# Altium PCB SensWear-V1R1-MainBoard.PcbDoc (part 3 of 3)
Units mm, origin at the board's own origin, x right, y up, seen from the top; angles counter-clockwise.
Board outline 50.5 x 8.5 mm, 4 copper layers (Top Layer, Layer 1, Layer 2, Bottom Layer), stack 0.148 mm thick; 73 components, 59 nets, 271 pads, 109 vias.
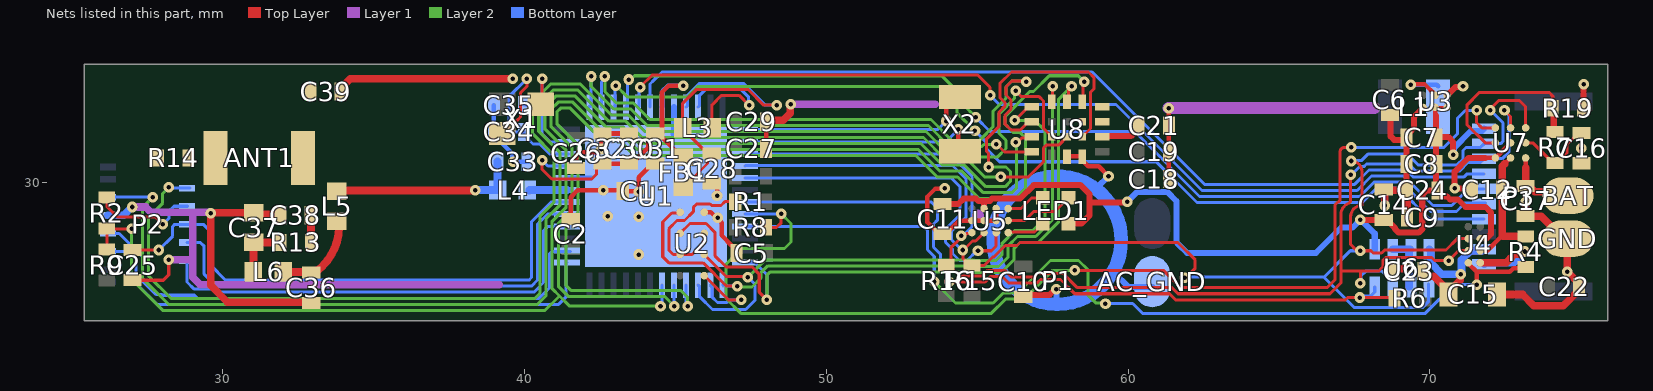
[diagram p4: the nets of this part, all layers, seen from the top]

## Via types
v1: diameter 0.35, hole 0.15, Top Layer to Bottom Layer, tented both sides, 109 vias

## Nets (pads, with @x,y where several pads share a name; then routed paths per layer and width w, separated by ;. In a path a pad name is that pad's centre, name@x,y a point inside that pad or via, vN(x,y) a via of type N, cw(c..) or ccw(c..) an arc to the next point about the centre after c; other vN are vias at no path point) (continued)
GAUGE_IRQ: R8.2 U1.8 U7.A1 | length 38.8
  Top Layer w0.1: R8.2@48,28.5 48.35,28.5 48.5,28.65 v1(48.5,28.95) ; v1(58.225,27.075) 61.165,27.075 61.74,26.5 66.591,26.5 66.85,26.759 66.85,27.156 66.85,29.175 cw(c67.025,29.175) 66.962,29.338 ccw(c66.925,29.431) 67.015,29.388 67.025,29.409 67.025,31 cw(c67.175,31) 67.175,31.15 v1(67.4,31.15) ; v1@71.55,32.35 71.55,31.975 71.725,31.8 U7.A1@72.175,31.8
  Layer 2 w0.1: v1(48.5,28.95) 48.825,28.625 48.825,28.015 48.61,27.8 47.2,27.8 46.675,27.275 46.675,26.14 47.165,25.65 55.465,25.65 55.94,26.125 56.557,26.125 57.507,27.075 v1(58.225,27.075)
  Bottom Layer w0.1: U1.8@47.302,28.936 48.486,28.936 v1(48.5,28.95) ; v1(67.4,31.15) 70.462,31.15 70.925,31.613 70.925,32.125 71.175,32.375 v1(71.55,32.375)
GND: AC_GND.1 C1.2 C2.2 C5.1 C6.2 C7.1 C8.2 C9.2 C10.1 C11.2 C12.2 C14.1 C15.1 C16.2 C17.2 C18.1 C19.1 C21.2 C22.1 C23.1 C24.2 C25.1 C26.2 C27.2 C28.1 C29.2 C30.1 C31.1 C32.1 C33.2 C34.1 C35.1 C36.1 C37.1 C38.1 C39.2 GND.1 P1.2 P2.7 P3.10 R19.2 U1.32 U1.44 U1.49 U2.D1 U3.A1 U3.C2 U4.D2 U5.A3 U5.B1 U5.B2 U5.B3 U6.2 U6.3 U6.6 U7.B2 U7.C1 U8.6 U8.7 | length 97.3
  Top Layer w0.1: C16.2@75.025,30.625 v1@75.025,31.075
  Top Layer w0.12: C25.1@27,26.75 28.025,26.75 28.2,26.925 v1(28.2,27.425) v1@28.2,27.45
  Top Layer w0.15: C2.2@41.527,28.776 41.527,29.501 41.752,29.726 v1(42.602,29.726) 43.227,29.726 C1.2@43.252,29.701 v1@43.727,29.701 ; C26.2@41.702,30.461 41.702,30.898 41.789,30.986 42.38,30.986 42.49,31.097 v1(42.544,31.097) 42.544,31.493 C32.1@42.452,31.586 ; C32.1@42.562,31.611 C30.1@43.452,31.611 ; v1@43.777,29.701 43.777,30.161 44.227,30.611 C31.1@44.327,30.611 ; U2.D1@45.952,29.001 46.174,29.001 46.527,28.648 46.527,28.231 46.883,27.875 46.9,27.875 46.95,27.825 C5.1@46.95,27.65 ; C28.1@46.202,29.951 46.25,29.951 46.375,29.826 v1(46.375,29.55) ; C27.2@48.002,31.101 C29.2@48.002,32.001 C29.2@48.05,32.05 ; v1(53.925,29.8) 53.912,29.787 53.615,29.787 53.35,29.522 53.35,28.675 53.75,28.275 C11.2@53.85,28.275 53.95,28.275 54.4,28.725 U5.B1@54.825,28.725 U5.B2@55.225,28.725 U5.B3@55.6,28.725 ; U5.B3@55.625,28.725 U5.A3@55.625,29.125 ; U8.6@57.975,30.862 58.475,30.862 58.475,30.724 58.674,30.525 59.025,30.525 v1(59.35,30.2) ; C18.1@61.35,30.1 C19.1@61.35,31 C21.2@61.35,31.875 v1(61.35,32.45) ; 71.85,30.8 U7.C1@72.175,30.8 ; U7.C1@72.2,30.825 U7.B2@72.675,31.3
  Top Layer w0.2: C10.1@56.525,26.1 56.686,26.261 57.395,26.261 57.584,26.45 v1(57.625,26.45) ; C6.2@68.7,32.075 68.7,31.517 68.817,31.4 C7.1@69.225,31.4 ; C24.2@69.225,29.75 C8.2@69.225,30.6 C7.1@69.225,31.4 ; U3.A1@69.775,32.475 69.775,32.461 69.475,32.161 69.475,31.792 69.358,31.675 69.325,31.675 69.225,31.575 C7.1@69.225,31.475 C7.1@69.225,31.4 ; U3.C2@70.575,32.875 70.846,33.146 71.071,33.146 v1(71.1,33.175) ; v1(70.825,29.8) 70.825,30.35 71.275,30.8 71.85,30.8 ; v1@70.832,29.793 71.3,29.793 C12.2@71.332,29.793 ; R19.2@75.085,32.45 75.092,32.457 75.092,33.242 v1(75.1,33.25)
  Top Layer w0.25: C38.1@31.9,28.9 31.86,28.94 31.035,28.94 30.997,28.978 29.603,28.978 v1(29.6,28.975) 29.6,26.575 30.15,26.025 32.9,26.025 C36.1@32.925,26 ; C39.2@33.9,33 33.9,33.1 34.226,33.426 v1(39.602,33.426) ; C29.2@48.052,32.052 48.577,32.052 48.8,32.275 48.8,32.523 48.806,32.529 48.806,32.594 v1@48.8,32.6 ; C14.1@68.475,29.75 68.475,29.7 68.5,29.675 v1(68.5,29.225) ; C14.1@68.587,29.737 C24.2@69.25,29.737 ; C23.1@68.725,27.15 68.744,27.131 69.281,27.131 v1(69.3,27.15) ; C23.1@68.823,26.927 C23.1@68.875,26.875 ; C9.2@69.25,28.825 C24.2@69.25,29.725 ; U4.D2@71.675,27.325 72.529,27.325 72.675,27.471 72.675,27.473 72.807,27.605 73.028,27.605 73.123,27.7 v1(73.15,27.7) ; C15.1@72.225,26.275 73.075,26.275 73.45,25.9 74.425,25.9 74.95,26.425 C22.1@74.95,26.525 ; C17.2@73.175,28.875 v1@73.175,29.325 ; C17.2@73.25,28.875 73.7,28.875 74.45,28.125 GND.1@74.525,28.125 ; GND.1@74.55,28.1 v1(74.55,27.025) C22.1@75,26.575
  Layer 1 w0.25: v1(27,29.175) 27.434,29.175 27.609,29 28.975,29 ; v1(28.2,27.425) 29,27.425 ; v1(29.6,28.975) 29.581,28.994 29.51,28.994 29.504,29 28.975,29 ; 39.153,26.6 29.25,26.6 29,26.85 29,27.425 ; v1(48.825,32.575) 53.6,32.575 ; 28.975,29 29,28.975 29,27.425
  Layer 1 w0.4: v1@61.348,32.45 v1(61.35,32.45) 68.173,32.45
  Bottom Layer w0.15: C34.1@38.977,31.661 38.977,31.561 39.588,30.949 39.588,30.714 v1(39.627,30.676) C33.2@40.102,30.676 ; C34.1@38.977,31.726 C35.1@38.977,32.551 ; U1.32@41.402,30.136 42.217,30.136 U1.49@42.227,30.126
  Bottom Layer w0.2: U1.49@44.927,31.601 44.952,31.626 U1.44@44.952,32.486 ; 57.6,25.9 57.625,25.925 57.625,25.95 v1(57.625,26.45) ; v1(59.35,30.2) 58.967,29.817 58.967,29.743 58.967,29.651 59.4,29.218 ; 59.55,26.975 60,26.525 AC_GND.1@60.8,26.525
  Bottom Layer w0.25: P2.7@26.19,28.9 26.709,28.9 26.984,29.175 v1(27,29.175) ; U6.2@68.775,27.77 69.345,27.77 U6.3@69.35,27.775 ; v1@69.3,27.177 v1(69.3,27.15) 69.319,27.131 v1@69.319,27.102 ; U6.6@69.325,26.525 v1@69.325,27.047 ; v1@69.325,27.252 U6.3@69.325,27.75 ; P3.10@71.8,27.275 71.85,27.325 72.775,27.325 v1(73.15,27.7)
  other v1: 43.775,27.6 46.4,28.825 43.775,28.85 42.75,28.875 73.175,29.35 43.777,29.676 75.025,31.125
LED_EN: U1.5 U5.C3 | length 11.9
  Top Layer w0.1: v1(55.025,27.725) 55.475,27.725 55.625,27.875 U5.C3@55.625,28.325
  Bottom Layer w0.1: U1.5@47.302,30.136 54.139,30.136 54.425,29.85 54.425,28.917 53.95,28.442 53.95,28.174 53.95,28.008 54.183,27.775 54.183,27.633 54.415,27.4 54.66,27.4 54.985,27.725 v1(55.025,27.725)
MCU_R\E\S\E\T\: C25.2 P2.6 U1.30 | length 18.5
  Top Layer w0.1: C25.2@27,27.75 v1(27.875,27.75)
  Bottom Layer w0.1: v1(27.875,27.75) 28.333,28.208 28.333,28.532 28.401,28.6 P2.6@28.81,28.6 29.35,28.6 29.575,28.375 29.575,27.258 30.083,26.75 40.14,26.75 40.225,26.835 40.225,28.687 40.875,29.336 U1.30@41.402,29.336
MCU_RX: P2.2 U1.28 | length 15.4
  Bottom Layer w0.1: P2.2@28.81,27.4 28.81,26.69 29.05,26.45 29.817,26.45 29.917,26.35 40.306,26.35 40.625,26.669 40.625,28.395 40.767,28.536 U1.28@41.402,28.536
MCU_SWD_CLK: P2.5 U1.26 | length 18
  Bottom Layer w0.1: P2.5@26.19,28.3 26.558,28.3 27.325,27.533 27.325,26.725 27.775,26.275 27.975,26.275 28,26.25 29.05,26.25 29.15,26.15 40.475,26.15 40.825,26.5 40.825,27.625 40.9,27.7 U1.26@41.526,27.7
MCU_SWD_IO: P2.3 U1.25 | length 17.6
  Bottom Layer w0.1: P2.3@26.19,27.7 26.875,27.7 27.125,27.45 27.125,26.642 27.817,25.95 41.128,25.95 41.377,26.198 41.377,27.311 U1.25@41.402,27.336
MCU_TX: P2.4 U1.29 | length 15.8
  Bottom Layer w0.1: P2.4@28.81,28 29.25,28 29.375,27.875 29.375,26.95 29.675,26.65 29.9,26.65 30,26.55 39.9,26.55 40.223,26.55 40.425,26.752 40.425,27.075 40.425,28.604 40.758,28.936 U1.29@41.392,28.936
MEM_SPI_C\S\: U1.14 U2.A1 | length 3.1
  Top Layer w0.1: U2.A1@45.952,26.901 46.753,26.1 v1(47.175,26.1)
  Bottom Layer w0.1: U1.14@46.152,26.586 46.202,26.536 46.202,26.198 46.389,26.011 46.714,26.011 46.803,26.1 v1(47.175,26.1)
MPU_CLK: U1.12 U2.C2 U8.13 | length 23.3
  Top Layer w0.1: U2.C2@45.152,28.301 45.477,28.626 46.015,28.626 46.302,28.34 46.302,27.56 46.669,27.192 47.533,27.192 47.775,26.95 47.775,26.35 v1(48.025,26.1) ; U8.13@57.975,32.687 58.027,32.739 58.027,33.152 v1@58.075,33.2
  Layer 2 w0.1: v1(48.025,26.1) 48.025,26.909 48.141,27.025 54.7,27.025 54.725,27 55.491,27 55.791,27 56.225,27.434 56.225,27.734 56.225,27.81 56.415,28 57.018,28 57.7,28.682 57.7,32.75 58.1,33.15 v1@58.125,33.15
  Bottom Layer w0.1: U1.12@47.302,27.336 47.627,27.336 48.025,26.938 v1(48.025,26.1)
  other v1: 58.125,33.175
MPU_CS#: U1.16 U8.12 | length 35.1
  Top Layer w0.1: U8.12@58.475,32.687 58.512,32.724 58.512,33.288 v1(58.55,33.325)
  Layer 2 w0.1: v1(45.402,25.888) 45.402,26.173 45.162,26.413 41.53,26.413 41.377,26.566 41.377,28.602 41.775,29 41.775,31.225 41.067,31.933 41.067,32.325 41.191,32.45 41.51,32.45 42.538,31.422 43.103,31.422 43.65,30.875 52.968,30.875 53.672,30.172 54.353,30.172 55.075,29.45 56.25,29.45 56.6,29.8 56.6,31.46 56.41,31.65 56.19,31.65 55.925,31.915 55.925,32.185 56.74,33 56.865,33 57.39,33.525 58.35,33.525 v1(58.55,33.325)
  Bottom Layer w0.1: U1.16@45.352,26.586 45.352,25.938 v1(45.402,25.888)
MPU_GPIO0: U1.38 U8.2 | length 20.8
  Top Layer w0.1: v1@56.625,33.35 56.14,33.35 55.95,33.16 55.95,32.89 56.116,32.724 56.116,32.415 55.925,32.224 55.925,31.915 56.115,31.725 56.425,31.725 56.7,32 U8.2@56.812,32
  Layer 2 w0.1: v1(42.66,33.501) 42.66,32.998 43.035,32.622 43.6,32.622 44.147,32.075 53.465,32.075 54.165,31.375 55.06,31.375 55.11,31.425 55.116,31.425 55.525,31.834 55.525,32.35 55.95,32.775 55.95,33.16 56.14,33.35 v1@56.625,33.35
  Bottom Layer w0.1: U1.38@42.55,32.488 42.55,32.86 42.552,32.861 42.552,33.325 42.66,33.433 v1(42.66,33.501)
  other v1: 56.625,33.325
MPU_GPIO1: U1.17 U8.3 | length 30.1
  Top Layer w0.1: v1(56.275,31.325) 56.343,31.325 56.485,31.467 56.641,31.467 U8.3@56.675,31.5
  Layer 2 w0.1: v1(44.952,25.888) 44.952,25.897 44.636,26.213 41.448,26.213 41.113,26.547 41.113,28.621 41.575,29.083 41.575,31.142 40.867,31.851 40.867,32.408 41.109,32.65 41.593,32.65 42.621,31.622 43.186,31.622 43.733,31.075 53.051,31.075 53.751,30.375 54.475,30.375 55.2,29.65 56.15,29.65 56.3,29.8 56.3,31.3 v1(56.275,31.325)
  Bottom Layer w0.1: v1@44.95,25.786 44.952,25.788 v1(44.952,25.888) U1.17@44.952,26.586
MPU_GPIO2: U8.10
MPU_GPIO3: U8.11
MPU_GPIO4: U8.18
MPU_IRQ#: U1.37 U8.4 | length 16.9
  Top Layer w0.1: v1(55.625,31.25) 55.655,31.25 55.905,31 U8.4@56.787,31
  Layer 2 w0.1: v1(42.203,33.501) 42.203,33.172 42.953,32.422 43.517,32.422 44.064,31.875 53.383,31.875 54.083,31.175 55.142,31.175 55.217,31.25 v1(55.625,31.25)
  Bottom Layer w0.1: U1.37@42.127,32.511 U1.37@42.152,32.486 ; U1.37@42.202,32.511 v1@42.202,33.477
MPU_MISO: U1.15 U2.B1 U8.1 | length 20.8
  Top Layer w0.1: U2.B1@45.952,27.601 46.678,26.875 47.375,26.875 v1(47.4,26.85) ; v1(56.25,32.05) 56.625,32.425 56.7,32.5 U8.1@56.812,32.5
  Layer 2 w0.1: v1(47.4,26.85) 47.975,27.425 54.865,27.425 54.89,27.4 55.625,27.4 55.825,27.6 55.825,27.975 56.25,28.4 56.852,28.4 57.25,28.798 57.25,31.7 56.9,32.05 v1@56.258,32.05
  Bottom Layer w0.1: U1.15@45.752,26.586 45.802,26.536 45.802,26.198 46.225,25.775 47.325,25.775 47.627,26.077 47.627,26.623 v1(47.4,26.85)
MPU_MOSI: U1.13 U2.D2 U8.14 | length 22
  Top Layer w0.1: U2.D2@45.152,29.026 45.102,28.976 44.877,28.976 44.577,28.676 44.577,27.526 44.777,27.326 45.915,27.326 46.692,26.55 v1(47.05,26.55) ; U8.14@57.475,32.687 57.487,32.699 57.487,33.163 v1(57.5,33.175)
  Layer 2 w0.1: v1@47.025,26.55 47.05,26.525 47.535,26.525 47.825,26.815 47.825,26.992 48.058,27.225 54.783,27.225 54.808,27.2 55.408,27.2 55.708,27.2 56.025,27.517 56.025,27.817 56.025,27.892 56.333,28.2 56.935,28.2 57.5,28.765 v1(57.5,33.175)
  Bottom Layer w0.1: U1.13@46.577,26.675 46.577,26.575 46.602,26.55 v1(47.05,26.55)
MPU_R\E\S\E\T\: R2.1 R9.2 U1.18 U8.17 | length 55.7
  Top Layer w0.1: R9.2@26.15,27.76 R2.1@26.15,28.465 26.165,28.45 v1@26.95,28.45 ; v1(55.375,30.5) 55.375,30.959 55.3,31.034 55.3,31.425 55.725,31.85 55.725,32.325 55.916,32.516 55.916,32.641 55.75,32.808 55.75,33.265 56.135,33.65 58.685,33.65 58.875,33.46 58.875,33.105 58.751,32.98 58.751,31.775 U8.17@58.475,31.5
  Layer 2 w0.1: v1(26.975,28.45) 26.975,26.775 28,25.75 40.675,25.75 41.151,26.226 ; v1(44.502,25.888) 41.49,25.888 41.151,26.226 ; v1(55.375,30.5) 55.95,30.5 56.1,30.35 56.1,30.025 55.925,29.85 55.283,29.85 54.558,30.575 53.834,30.575 53.134,31.275 43.815,31.275 43.269,31.822 42.704,31.822 41.676,32.85 41.026,32.85 40.667,32.491 40.667,31.768 41.375,31.059 41.375,29.166 40.913,28.704 40.913,26.464 41.151,26.226
  Bottom Layer w0.1: v1(44.502,25.888) 44.552,25.938 U1.18@44.552,26.586
MPU_SWD_CLK: P2.10 U8.15 | length 45.7
  Top Layer w0.1: v1(56.275,33.025) 56.468,32.832 57.054,32.832 57.2,32.687 57.2,32.425 ; 57.2,32.425 57.2,31.775 57.45,31.525 U8.15@57.475,31.525
  Layer 2 w0.1: v1(28.2,29.825) 28,29.625 28,29.3 27.525,28.825 27.525,26.9 28.275,26.15 40.342,26.15 40.502,26.31 40.502,28.858 40.975,29.331 40.975,30.894 40.267,31.602 40.267,32.656 40.86,33.25 41.842,33.25 42.87,32.222 43.434,32.222 43.981,31.675 53.3,31.675 54,30.975 54.948,30.975 55.098,30.825 55.66,30.825 55.95,31.115 55.95,31.385 55.725,31.61 55.725,32.267 56.227,32.77 56.227,32.977 v1(56.275,33.025)
  Bottom Layer w0.1: v1(28.2,29.825) 28.212,29.813 28.887,29.813 P2.10@28.9,29.8
MPU_SWD_DIO: P2.9 U8.16 | length 44.7
  Top Layer w0.1: v1(55.775,30.175) 56.7,30.175 57.2,30.675 57.2,31.136 57.288,31.225 57.7,31.225 U8.16@57.975,31.5
  Layer 2 w0.1: v1(27.675,29.5) 27.325,29.15 27.325,26.817 28.192,25.95 40.425,25.95 40.702,26.227 40.702,28.775 41.175,29.249 41.175,30.976 40.467,31.685 40.467,32.574 40.943,33.05 41.759,33.05 42.787,32.022 43.351,32.022 43.898,31.475 53.217,31.475 53.917,30.775 54.64,30.775 55.24,30.175 v1(55.775,30.175)
  Bottom Layer w0.1: P2.9@26.19,29.5 v1(27.675,29.5)
NetANT1_1: ANT1.1 C38.2 C39.1 R13.2 R14.1 | length 0.9
  Top Layer w0.265: R13.2@32.9,27.975 32.91,27.985 32.91,28.89 C38.2@32.9,28.9
NetANT1_2: ANT1.2 R14.2
NetC16_1: C16.1 R7.2 U7.B3 | length 2.7
  Top Layer w0.1: U7.B3@73.175,31.3 73.415,31.3 74.09,30.625 R7.2@74.15,30.625 ; R7.2@74.15,30.64 74.225,30.64 74.55,30.965 74.55,31.25 74.95,31.65 C16.1@75.025,31.65
NetC21_1: C21.1 U8.9 | length 1.2
  Top Layer w0.2: U8.9@59.138,31.525 60.1,31.525 60.25,31.675 C21.1@60.25,31.75
NetC28_2: C28.2 FB1.2 L3.1 U1.45 | length 10.9
  Top Layer w0.1: FB1.2@45.252,29.836 45.282,29.836 46.059,30.614 46.059,31.009 C28.2@46.077,31.026 ; C28.2@46.077,31.076 45.932,31.076 45.237,31.771 L3.1@45.237,31.801 45.237,32.611 45.702,33.076 47.399,33.076 47.924,32.551 v1(48.352,32.551)
  Bottom Layer w0.1: U1.45@45.352,32.486 45.402,32.536 45.402,32.876 45.8,33.275 47.247,33.275 47.971,32.551 v1(48.352,32.551)
NetC30_2: C30.2 C31.2 C32.2 FB1.1 U1.33 U1.43 | length 10.5
  Top Layer w0.1: v1(40.577,30.726) 40.577,30.426 40.902,30.101 42.227,30.101 42.377,30.251 42.377,30.461 42.517,30.601 C32.2@42.602,30.601
  Top Layer w0.15: C32.2@42.602,30.611 43.552,30.611 44.102,31.161 44.102,31.486 44.217,31.601 C31.2@44.227,31.601 ; C31.2@44.482,31.556 44.552,31.486 45.222,30.816 FB1.1@45.252,30.816 ; C31.2@44.527,31.601 44.552,31.626 44.552,32.977 44.775,33.2 v1(45.25,33.2)
  Bottom Layer w0.1: v1(40.577,30.726) 40.767,30.536 U1.33@41.402,30.536
  Bottom Layer w0.15: U1.43@44.552,32.486 44.577,32.511 44.577,33.027 44.75,33.2 v1(45.25,33.2)
NetC33_1: C33.1 L4.2 L5.1 | length 6.3
  Top Layer w0.265: L5.1@33.775,29.715 38.34,29.715 v1(38.357,29.731)
  Bottom Layer w0.265: v1@38.352,29.726 v1(38.357,29.731) L4.2@39.107,29.731 ; C33.1@39.102,30.676 39.107,30.671 39.107,29.771 L4.2@39.127,29.751
NetC34_2: C34.2 U1.34 X1.3 | length 6.5
  Top Layer w0.1: X1.3@39.252,31.611 39.302,31.611 39.739,32.049 39.751,32.049 39.864,32.161 39.864,32.961 40.072,33.169 40.072,33.422 v1(40.075,33.425)
  Bottom Layer w0.1: v1(40.075,33.425) 39.477,32.827 39.477,31.761 39.577,31.661 C34.2@39.977,31.661 39.977,31.561 40.277,31.261 40.502,31.261 40.836,30.926 U1.34@41.452,30.926
NetC35_2: C35.2 U1.35 X1.1 | length 4.2
  Top Layer w0.1: X1.1@40.527,32.586 40.577,32.636 v1(40.577,33.426)
  Bottom Layer w0.1: C35.2@39.977,32.551 40.577,32.551 ; v1(40.577,33.426) 40.577,32.551 ; U1.35@41.402,31.336 40.842,31.336 40.577,31.601 40.577,32.551
NetC36_2: C36.2 L5.2 L6.1 | length 3.1
  Top Layer w0.265: L6.1@31.99,27.025 32.002,27.013 C36.2@32.925,27.013 ; C36.2@32.925,27 33.102,27.062 33.146,27.078 ccw(c31.97,28.545) 33.85,28.498 33.851,28.545 33.835,28.589 L5.2@33.775,28.76
NetC37_2: C37.2 L6.2 R13.1 | length 1.8
  Top Layer w0.265: L6.2@31.01,27.025 31.017,27.033 31.017,27.942 C37.2@31.025,27.95 ; C37.2@31.025,28 R13.1@31.9,28
NetL1_1: L1.1 U3.B2 | length 1.9
  Top Layer w0.15: v1@69.35,33.25 69.824,33.25 70.175,32.899 U3.B2@70.175,32.875
  Bottom Layer w0.15: v1(69.375,33.225) 70.225,33.225 L1.1@70.275,33.175
NetL3_2: L3.2 U1.46 | length 4.8
  Top Layer w0.1: L3.2@46.217,31.801 46.217,32.566 46.527,32.876 47.111,32.876 47.437,32.55 v1(47.45,32.55)
  Bottom Layer w0.1: U1.46@45.752,32.486 45.802,32.536 45.802,32.876 46,33.075 47.164,33.075 47.424,32.815 47.424,32.576 v1(47.45,32.55)
NetL4_1: L4.1 U1.31 | length 1.3
  Bottom Layer w0.265: L4.1@40.152,29.726 40.162,29.736 U1.31@41.402,29.736
NetLED1_2: LED1.2 U5.C4 | length 1.2
  Top Layer w0.1: U5.C4@56.025,28.325 56.05,28.35 56.9,28.35 57.125,28.575 LED1.2@57.15,28.575
NetLED1_3: LED1.3 U5.A4 | length 1.3
  Top Layer w0.1: U5.A4@56.025,29.125 56.45,29.125 56.8,29.475 LED1.3@57.175,29.475
NetLED1_4: LED1.4 U5.B4 | length 2.3
  Top Layer w0.1: U5.B4@56.025,28.725 56.57,28.725 56.87,29.025 57.575,29.025 LED1.4@58.025,29.475
NetP2_8: P2.8 R2.2 | length 3.6
  Top Layer w0.1: R2.2@26.15,29.485 26.15,29.195 26.495,28.85 27.758,28.85 v1(28.008,28.6)
  Bottom Layer w0.1: v1(28.008,28.6) 28.215,28.807 28.215,29.04 28.375,29.2 P2.8@28.825,29.2
NetR1_1: R1.1 U2.B2 U2.C1 | length 5.1
  Top Layer w0.1: U2.C1@45.952,28.301 45.952,28.002 45.551,27.601 U2.B2@45.152,27.601 44.927,27.601 44.777,27.751 44.777,28.451 45.052,28.726 45.294,28.726 45.589,29.021 45.589,29.164 45.702,29.276 46.148,29.276 46.199,29.225 46.51,29.225 46.635,29.35 R1.1@46.975,29.35
NetR7_1: R7.1 R19.1 U7.B1 | length 6.1
  Top Layer w0.1: U7.B1@72.175,31.3 71.835,31.3 71.225,31.91 71.225,32.55 71.65,32.975 73.95,32.975 74.075,32.85 R19.1@74.075,32.4
  Top Layer w0.2: R7.1@74.108,31.667 R19.1@74.108,32.4
NetU1_1: U1.1 X2.2 | length 8.2
  Top Layer w0.1: X2.2@54.425,32.825 X2.2@54.625,32.625
  Top Layer w0.15: v1(53.975,32.025) 53.975,32.625 54.05,32.7 X2.2@54.05,33.075
  Bottom Layer w0.1: U1.1@47.302,31.736 53.686,31.736 53.95,32 v1@54.025,32
NetU1_2: U1.2 X2.1 | length 8
  Top Layer w0.1: X2.1@53.875,30.825 X2.1@53.925,30.775
  Top Layer w0.15: v1(54.375,31.75) 54.375,31.125 X2.1@54.425,31.075
  Bottom Layer w0.1: U1.2@47.302,31.336 53.961,31.336 54.35,31.725 v1@54.375,31.725
  Bottom Layer w0.15: v1@54.362,31.737 v1(54.375,31.75)
PWR_I2C_SCL: P3.2 R15.2 U1.4 U4.B1 U5.C2 U6.5 U7.A3 | length 47.9
  Top Layer w0.1: R15.2@54.825,27.16 54.75,27.16 54.6,27.31 54.6,27.385 54.525,27.46 54.525,27.725 54.525,27.735 54.84,28.05 54.95,28.05 55.2,28.3 U5.C2@55.25,28.3 ; R15.2@54.825,27.235 55.229,27.235 55.519,27.525 55.558,27.525 55.933,27.9 56.315,27.9 56.415,28 61.65,28 62.225,27.425 62.225,27.14 61.91,26.825 v1(61.875,26.825) ; v1(67.4,30.7) cw(c67.4,30.35) 67.75,30.354 67.75,29.225 ccw(c67.75,28.85) 67.375,28.85 67.375,28.775 67.375,27.93 67.533,27.773 67.652,27.773 v1(67.7,27.725) 68.049,27.725 68.124,27.65 68.405,27.65 68.505,27.75 70.535,27.75 70.91,28.125 U4.B1@71.275,28.125 ; v1(72,32.375) 72,32.425 72.275,32.7 72.975,32.7 73.175,32.5 U7.A3@73.175,31.8
  Bottom Layer w0.1: U1.4@47.302,30.536 47.317,30.551 54.182,30.551 54.625,30.108 54.625,28.835 54.15,28.36 54.15,28.256 54.15,28.09 54.49,27.75 v1(54.525,27.75) ; v1(61.875,26.825) 61.9,26.85 66.49,26.85 ; v1(67.4,30.7) 67.412,30.712 67.731,30.712 67.944,30.925 69.257,30.925 69.607,30.575 70.91,30.575 71.1,30.765 71.1,31.05 71.2,31.15 71.675,31.15 P3.2@71.8,31.275 72.35,31.275 72.425,31.35 72.425,31.965 72.015,32.375 v1(72,32.375) ; v1(67.7,27.725) 67.365,27.725 66.49,26.85 ; U6.5@69.95,26.625 69.95,26.033 69.767,25.85 67.49,25.85 66.49,26.85
PWR_I2C_SDA: P3.3 R16.2 U1.3 U4.C1 U5.C1 U6.7 U7.A2 | length 43.6
  Top Layer w0.1: R16.2@53.975,27.245 54.05,27.245 R16.2@54.125,27.17 ; U5.C1@54.825,28.325 54.803,28.303 54.659,28.303 54.531,28.175 54.475,28.175 54.125,27.825 R16.2@54.125,27.17 ; v1(67.375,30.25) 67.375,29.377 67.371,29.363 cw(c67.275,29.393) 67.312,29.3 ccw(c67.46,28.917) 67.05,28.917 67.05,27.05 ; v1(67.7,26.65) 67.7,27.05 ; U4.C1@71.275,27.725 70.95,27.725 v1(70.625,27.4) 70.162,27.4 70.062,27.5 68.538,27.5 68.45,27.412 68.45,27.2 68.3,27.05 67.7,27.05 ; v1(72.475,32.375) 72.675,32.175 U7.A2@72.675,31.8 ; R16.2@54.125,27.17 54.41,26.885 55.162,26.885 55.252,26.975 55.352,27.075 55.907,27.075 56.007,26.975 56.132,26.85 56.887,26.85 57.012,26.975 57.842,26.975 58.317,26.5 61.458,26.5 61.658,26.3 66.69,26.3 67.05,26.66 67.05,27.05 ; 67.05,27.05 67.7,27.05
  Bottom Layer w0.1: U1.3@47.302,30.936 47.312,30.926 54.09,30.926 54.825,30.191 54.825,28.525 v1@54.475,28.175 ; v1(67.375,30.25) 67.41,30.25 67.672,30.512 67.814,30.512 67.902,30.6 69.299,30.6 69.524,30.375 70.992,30.375 71.267,30.65 71.675,30.65 P3.3@71.8,30.775 72.4,30.775 72.625,31 72.625,32.191 72.475,32.341 v1(72.475,32.375) ; v1(67.7,26.65) 67.717,26.667 67.717,26.892 67.875,27.05 68.415,27.05 68.715,26.75 U6.7@68.75,26.75
  other v1: 54.475,28.225
PWR_K\I\L\L\: R4.1 U1.9 U4.D1 | length 30.8
  Top Layer w0.15: U4.D1@71.275,27.325 71.275,27.301 71.551,27.025 ; v1@71.551,26.601 71.551,27.025 ; R4.1@73.125,27.175 73.087,27.137 72.765,27.137 72.653,27.025 71.551,27.025
  Layer 2 w0.1: v1(53.575,26.7) 54.278,25.997 55.529,25.997 55.858,26.325 56.35,26.325 57.425,27.4 58.36,27.4 58.675,27.085 58.675,26.25 58.925,26 59.2,26 v1@59.25,25.95
  Bottom Layer w0.1: U1.9@47.302,28.536 53.214,28.536 53.35,28.4 53.35,27.759 53.575,27.534 v1(53.575,26.7) ; v1(59.25,25.975) 60.15,25.975 60.475,25.65 69.85,25.65 70.8,26.6 v1(71.55,26.6)
SENSOR_GPIO_0: P3.4 U1.42 | length 30.5
  Bottom Layer w0.1: U1.42@44.152,32.486 44.152,33.252 44.275,33.375 44.55,33.65 58.81,33.65 62.535,29.925 67.51,29.925 67.985,30.4 69.216,30.4 69.441,30.175 71.138,30.175 71.238,30.275 P3.4@71.8,30.275
SENSOR_GPIO_1: P3.5 U1.41 | length 31.4
  Top Layer w0.1: v1(43.825,33.15) 44.225,33.55 55.012,33.55 55.422,33.14 55.422,32.878 v1(55.425,32.875)
  Bottom Layer w0.1: U1.41@43.752,32.486 43.796,32.53 43.796,33.121 v1(43.825,33.15) ; v1(55.425,32.875) 55.725,32.575 59.602,32.575 62.452,29.725 67.592,29.725 68.067,30.2 69.133,30.2 70.108,29.225 70.725,29.225 71.275,29.775 P3.5@71.8,29.775
SENSOR_GPIO_2: P3.6 U1.40 | length 31.9
  Layer 2 w0.1: v1(43.45,33.4) 43.518,33.4 43.643,33.525 53.825,33.525 54.525,32.825 54.525,32.575 v1(54.95,32.15)
  Bottom Layer w0.1: U1.40@43.352,32.486 U1.40@43.363,32.498 ; v1@43.363,33.388 v1@43.375,33.4 ; U1.40@43.413,32.498 v1@43.413,33.388 ; v1(54.95,32.15) 55.425,31.675 60.219,31.675 62.369,29.525 67.675,29.525 68.15,30 69.05,30 70.025,29.025 70.883,29.025 71.158,29.3 P3.6@71.85,29.3
SENSOR_GPIO_3: P3.7 U1.39 | length 32.4
  Layer 2 w0.1: v1(43.025,33.2) 43.4,32.825 45.4,32.825 45.75,33.175 53.892,33.175 54.325,32.742 54.325,32.3 v1(54.925,31.7)
  Bottom Layer w0.1: U1.39@42.95,32.488 U1.39@42.952,32.486 ; U1.39@43,32.488 v1@43,33.175 ; v1(54.925,31.7) 55.3,31.325 55.3,31.115 55.74,30.675 60.936,30.675 62.286,29.325 67.758,29.325 68.233,29.8 68.967,29.8 69.992,28.775 P3.7@71.8,28.775
V_BAT: C12.1 R4.2 U4.C2 U7.C2 | length 4.4
  Top Layer w0.15: U4.C2@71.675,27.725 71.9,27.725 72.375,28.2 ; 72.475,30.6 U7.C2@72.675,30.8
  Top Layer w0.25: 72.475,30.6 72.4,30.525 C12.1@72.4,29.75 72.4,28.375 72.4,28.225 72.425,28.2 R4.2@73.175,28.2
V_BAT+: BAT.1 C17.1 U7.C3 | length 2.2
  Top Layer w0.15: 73.175,30.525 U7.C3@73.175,30.8
  Top Layer w0.25: C17.1@73.175,29.875 73.175,30.475 ; C17.1@73.325,29.825 73.475,29.675 74.425,29.675 BAT.1@74.55,29.55
V_REG_EN: R6.2 U1.7 U6.8 | length 25.2
  Top Layer w0.1: v1(54.075,26.7) 54.09,26.685 55.245,26.685 55.435,26.875 55.824,26.875 56.049,26.65 56.97,26.65 57.095,26.775 57.76,26.775 58.235,26.3 61.375,26.3 61.575,26.1 67.2,26.1 67.275,26.175 v1(67.675,26.175) 68.8,26.175 R6.2@68.825,26.15
  Bottom Layer w0.1: U1.7@47.302,29.336 53.481,29.336 53.675,29.142 53.675,28.733 53.55,28.608 53.55,28.008 53.55,27.842 53.775,27.617 53.775,27.4 54.075,27.1 v1(54.075,26.7) ; v1(67.675,26.175) 67.743,26.175 67.801,26.233 68.048,26.233 68.175,26.36 U6.8@68.175,26.525
V_REG_IO: C15.2 C23.2 P3.9 U6.4 | length 4.8
  Top Layer w0.25: C23.2@69.8,27.05 69.8,26.95 69.875,26.875 70.125,26.875 C15.2@70.525,26.475 ; C15.2@70.625,26.275 70.625,26.375 71.006,26.756 71.006,26.931 v1(71.025,26.95)
  Bottom Layer w0.25: U6.4@69.975,27.77 70.027,27.717 70.027,27.323 70.4,26.95 v1(71.025,26.95) ; v1@71.05,26.975 71.05,27.418 71.357,27.725 71.75,27.725 P3.9@71.8,27.775
V_SYS: C7.2 C8.1 C11.1 C14.2 C24.1 LED1.1 P3.1 U3.B1 U3.C1 U4.B2 U5.A2 U6.1 | length 32.1
  Top Layer w0.1: U3.B1@70.175,32.475 U3.C1@70.55,32.475
  Top Layer w0.15: 70.175,32.25 U3.B1@70.175,32.475
  Top Layer w0.2: C11.1@53.9,29.275 54.375,29.275 54.55,29.45 54.96,29.45 55.035,29.375 55.225,29.375 ; U5.A2@55.225,29.125 55.225,29.375 ; LED1.1@58.025,28.625 58.45,28.625 58.725,28.9 58.725,29.325 ; v1(59.975,29.35) 59.95,29.325 58.725,29.325 ; v1(67.7,28.75) C14.2@68.475,28.75 68.55,28.75 68.562,28.763 68.85,28.475 68.85,28.442 68.967,28.325 69.633,28.325 69.75,28.442 69.75,29.575 69.9,29.725 C24.1@70.25,29.725 ; C24.1@70.2,29.827 C7.2@70.2,31.475 ; C7.2@70.2,31.5 70.2,32.2 ; C24.1@70.25,29.575 70.3,29.525 70.57,29.525 70.67,29.425 70.934,29.425 71.184,29.175 71.85,29.175 72.025,29 72.025,28.275 71.885,28.135 71.685,28.135 U4.B2@71.675,28.125 ; C7.2@70.25,31.5 70.605,31.5 70.775,31.33 v1(70.775,30.9) ; 55.225,29.375 55.415,29.375 55.49,29.45 56.417,29.45 56.867,29.9 58.425,29.9 58.725,29.6 58.725,29.325
  Bottom Layer w0.2: v1(59.975,29.35) 60.3,29.675 61.3,29.675 61.6,29.375 61.6,28.75 61.6,28.02 61.659,27.946 61.955,27.65 66.225,27.65 67.071,28.496 67.441,28.496 67.694,28.75 67.717,28.75 68.175,28.292 U6.1@68.175,27.77 ; v1(70.775,30.9) 70.804,30.929 70.804,31.138 71.366,31.7 71.725,31.7 P3.1@71.8,31.775
pads on no net: P2.P1 P2.P2 P3.0 U1.11 U1.19 U1.20 U1.21 U1.23 U1.24 U1.27 U5.A1 U8.19 U8.20 X1.2 X1.4

## Polygon pours and split planes (outlines as drawn)
GND on Layer 1 "GND_L02_P002" (solid, remove dead copper, pour order 2): 53.2,33.5 61.5,33.5 61.5,25.75 53.2,25.75
GND on Layer 1 "GND_L02_P003" (solid, remove dead copper, pour order 3): 38.65,34 49.475,34 49.475,25 38.65,25
GND on Layer 1 "GND_L02_P000" (solid, remove dead copper, pour order 0): 68,33.5 75.5,33.5 75.5,25.6 68,25.6
1V8 on Layer 2 "1V8_L03_P001" (solid, remove dead copper, pour order 1): 68,33.5 75.5,33.5 75.5,25.55 68,25.55

## Other copper
Top Layer:
  region net NetANT1_1: 33.15,28.9 33.15,33.4 25.65,33.4 25.65,30.3 28.25,30.3 28.25,31.1 26.45,31.1 26.45,32.6 32.65,32.6 32.65,28.9
  region net NetANT1_2: 28.75,30.3 29.95,30.3 29.95,31.1 28.75,31.1
  region: 40.389,31.999 40.089,31.699 40.089,31.224 40.964,31.224 40.964,31.999
Bottom Layer:
  region net GND: 57.7,25.7 ccw(c57.7,25.95) 57.95,25.95 ccw(c57.7,25.95) 57.7,26.2 ccw(c57.7,25.95) 57.45,25.95 ccw(c57.7,25.95)
  region net CHG_AC: 57.625,27.275 ccw(c57.625,27.525) 57.875,27.525 ccw(c57.625,27.525) 57.625,27.775 ccw(c57.625,27.525) 57.375,27.525 ccw(c57.625,27.525)

## Silkscreen, mask and mechanical layers (free items; w line width, h text height)
Top Overlay:
  drawing of 4 lines, arcs and shapes, not listed
  text "Hub" at 63.5,26.725 h1.85 r90
  text "Board" at 65.025,26.725 h1.85 r90
  text "SensWear" at 52.35,25.625 h1.85 r90
Bottom Overlay:
  drawing of 24 lines, arcs and shapes, not listed
  text "V0.R1" at 62.075,32.836 h1
  text "1" at 70.925,31.2 h1 r90
  text "+" at 62.675,28.158 h1
  text "AC" at 64.25,27.15 h1
  text "-" at 62.75,26.15 h1
  text "1" at 26.745,25.945 h1 r90
Mechanical 1:
  the board outline again, w0.1
Top Assembly:
  lines w0.1: 25.4,24.3 25.4,34.3 ; 33.9,24.5 33.9,35.9 ; 39.4,25 39.4,36 ; 47.9,25 47.9,35.3 ; 53.4,23.8 53.4,34.9 ; 61.9,24 61.9,34 ; 67.4,24 67.4,34 ; 75.9,23.4 75.9,33.4

## Dimensions
75.9,25.4 to 75.9,33.9 on Top Assembly
47.9,35.3 to 53.4,34.9 on Top Assembly
33.9,35.9 to 39.4,36 on Top Assembly
39.4,25 to 47.9,25 on Top Assembly
25.4,24.3 to 33.9,24.5 on Top Assembly
25.4,34.3 to 75.9,33.4 on Top Assembly
61.9,34 to 67.4,34 on Top Assembly
61.9,24 to 53.4,23.8 on Top Assembly
67.4,24 to 75.9,23.4 on Top Assembly